# Altium PCB go_sign.PcbDoc (part 1 of 3)
Units mm, origin at the board's own origin, x right, y up, seen from the top; angles counter-clockwise.
Board outline 188.34 x 188.34 mm, 2 copper layers (Top Layer, Bottom Layer); 124 components, 124 nets, 557 pads, 137 vias.
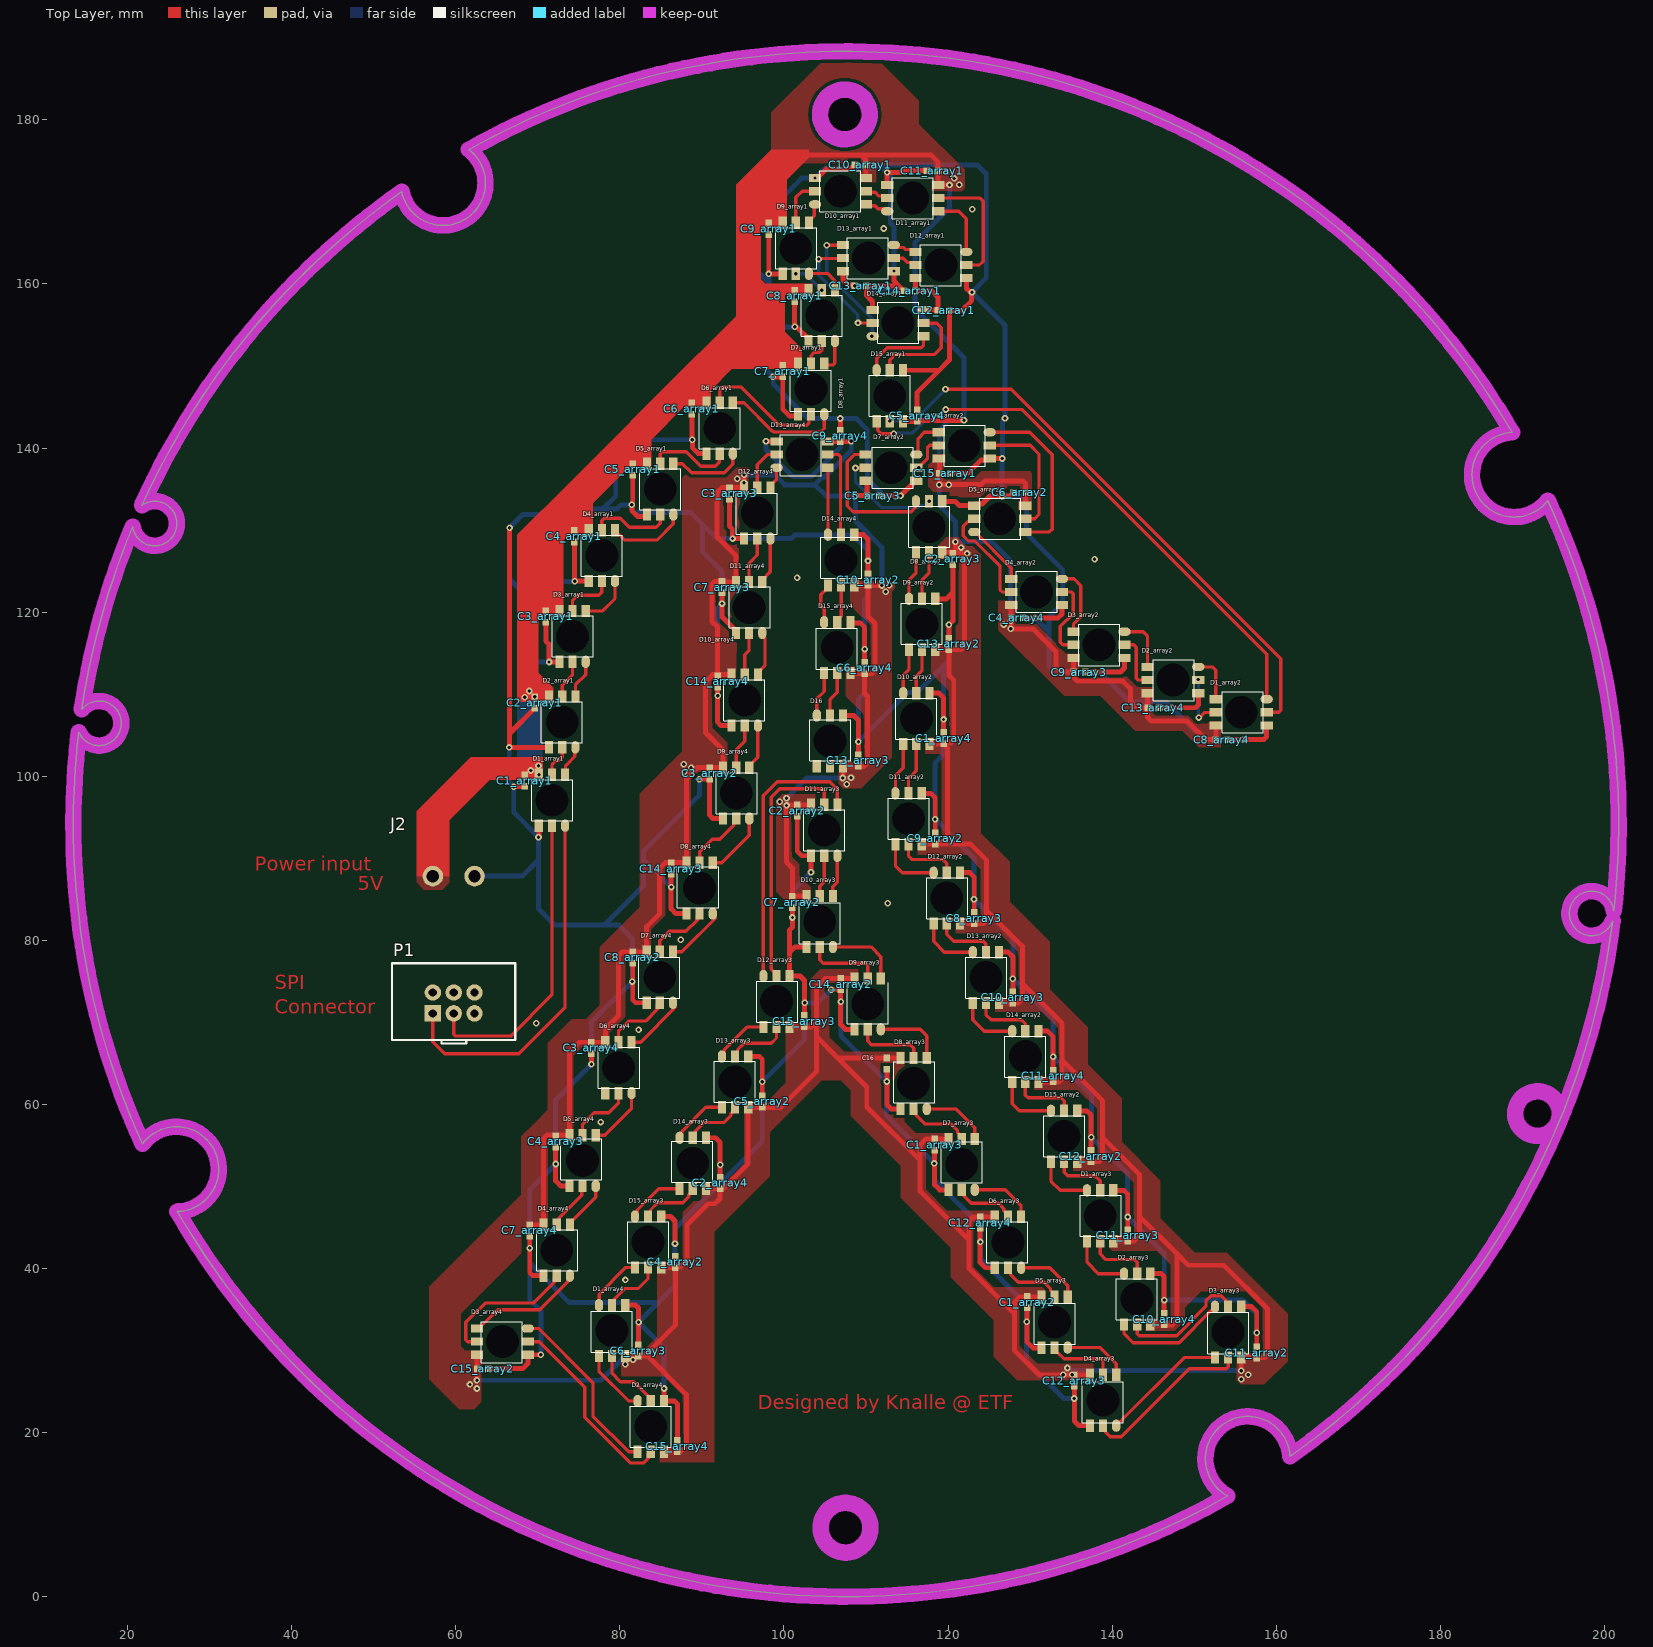
[diagram p0: Top Layer view]
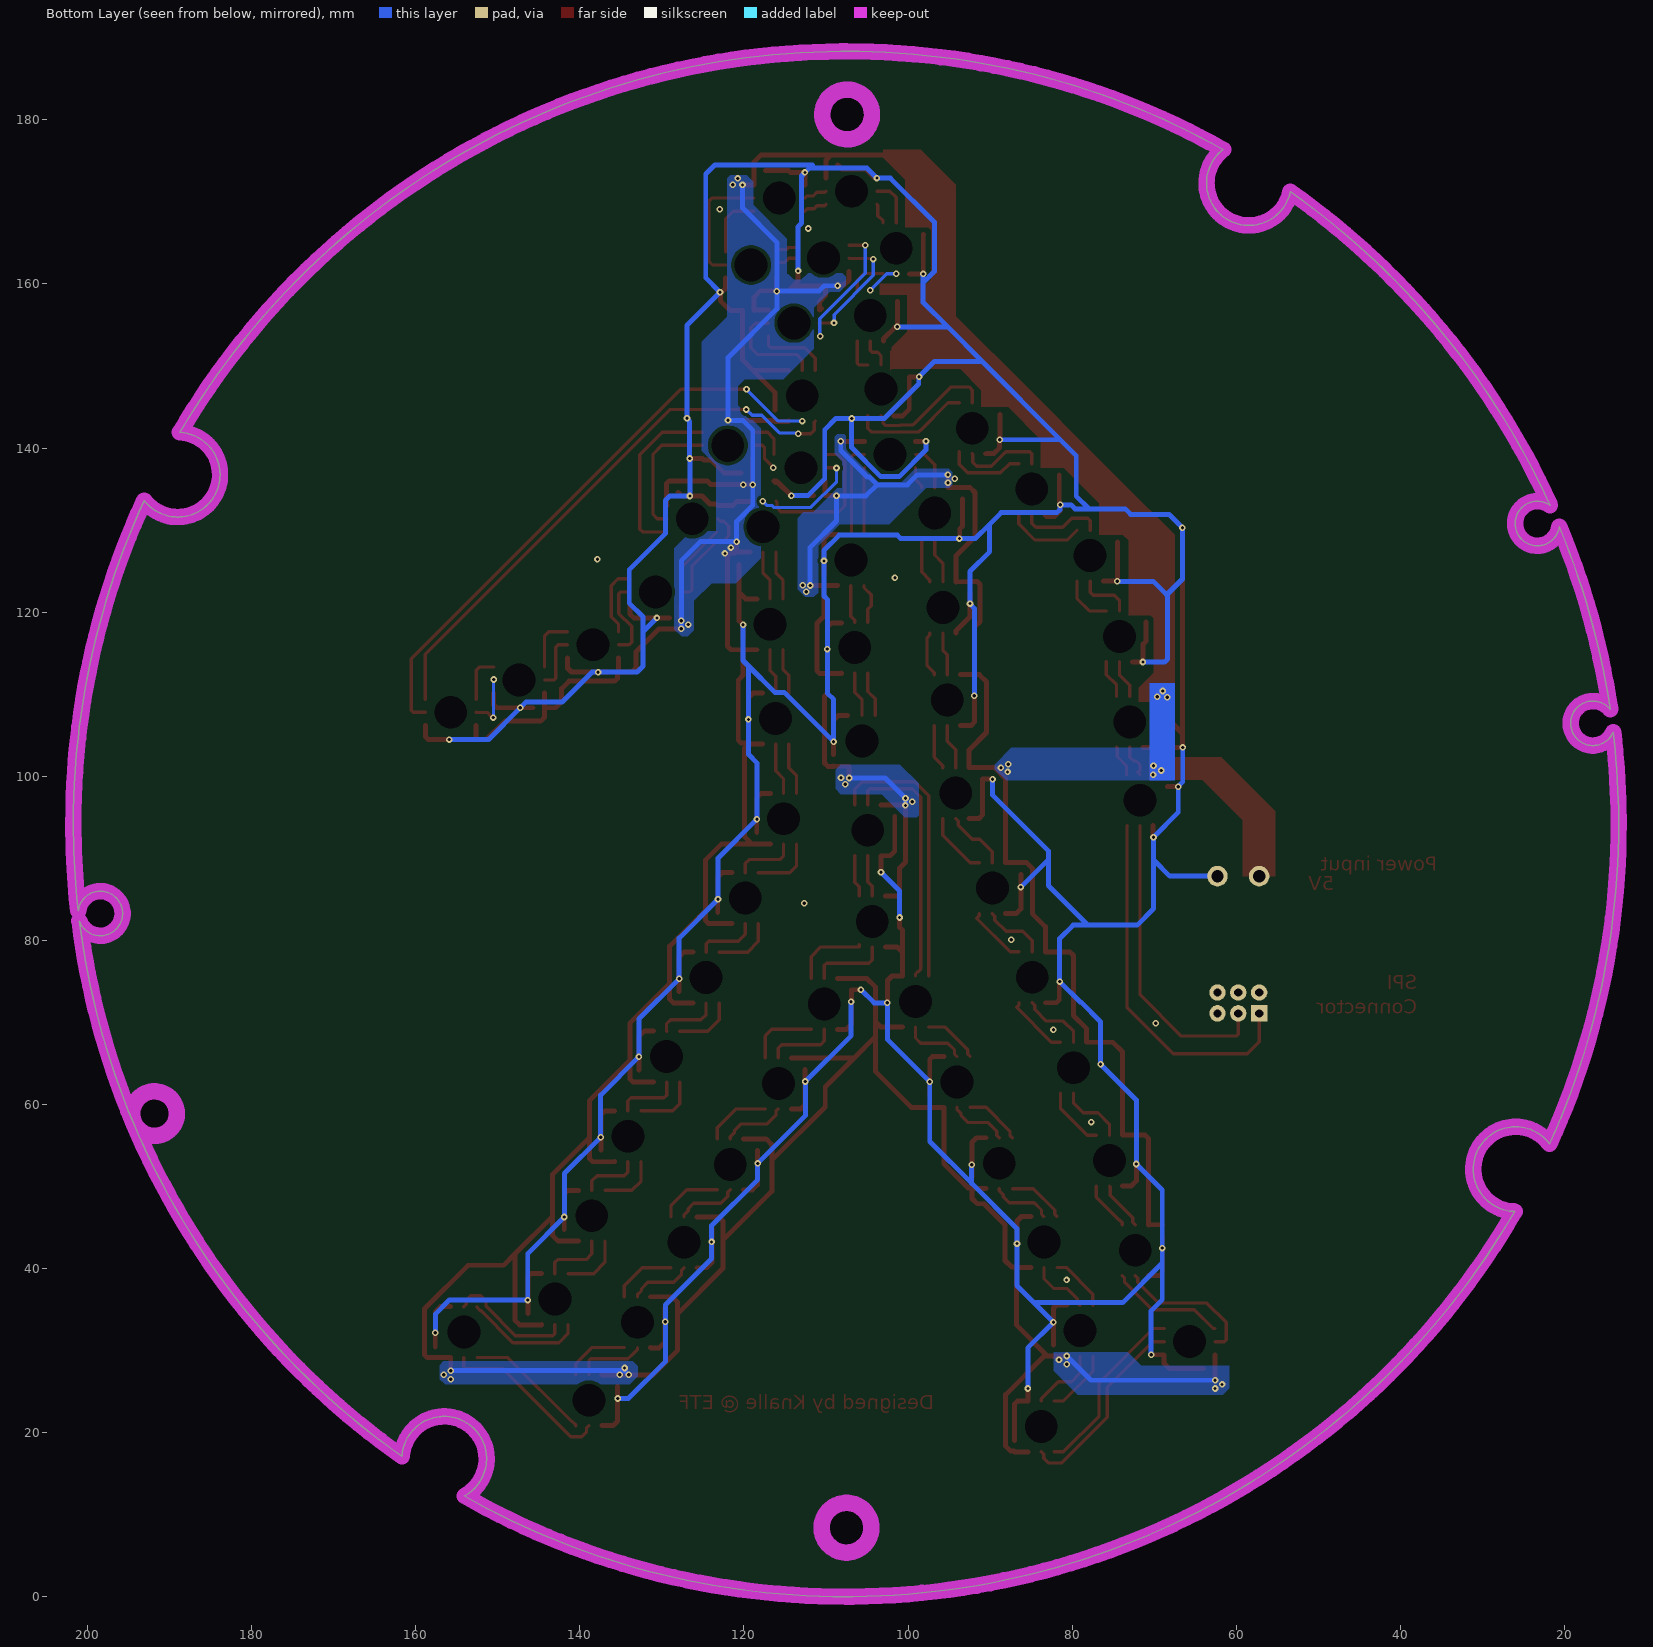
[diagram p1: Bottom Layer view, seen from below]
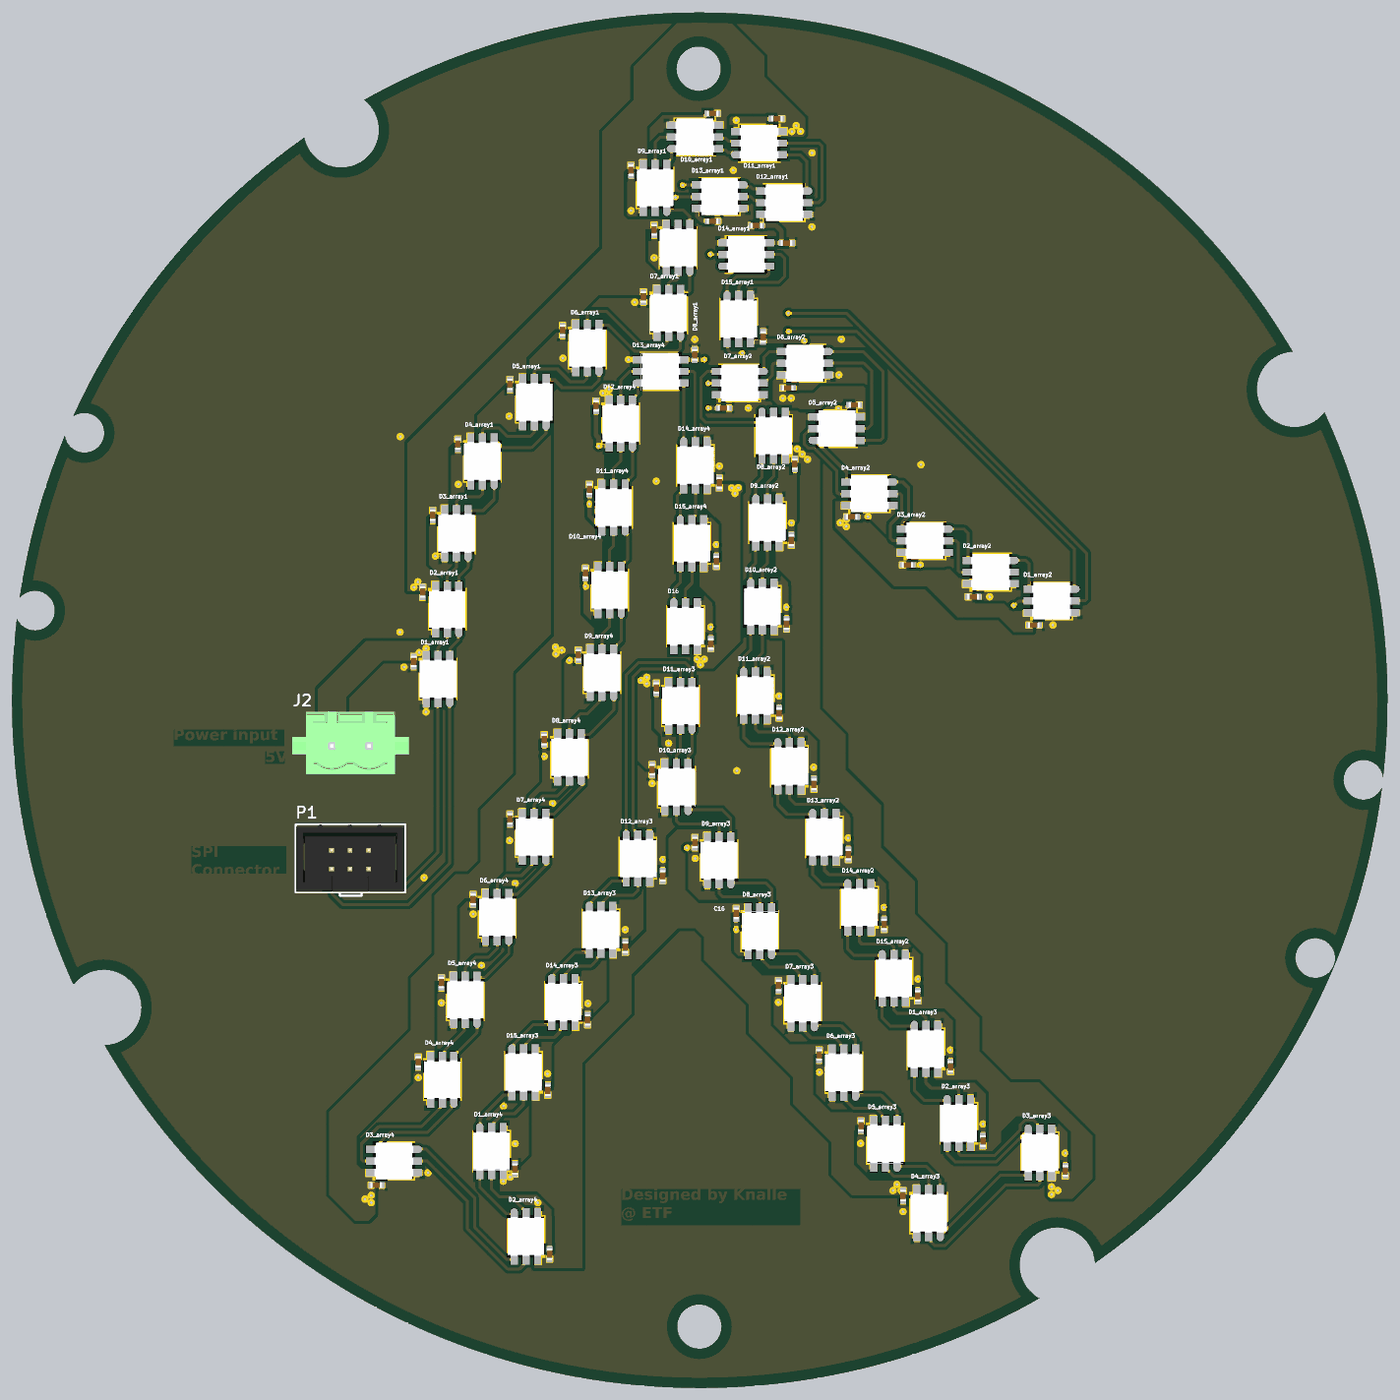
[diagram p3: 3D render of the assembled board from above, using the file's embedded part models]

## Layer stack, top to bottom
Top Solder: solder mask 0.0102, Solder Resist, Dk 3.5
Top Layer: signal copper 0.0356
Dielectric 1: dielectric 0.32, FR-4, Dk 4.8
Bottom Layer: signal copper 0.0356
Bottom Solder: solder mask 0.0102, Solder Resist, Dk 3.5

## Board outline
13.398,94.176 13.4,94.844 cw(c107.431,94.169) 13.486,98.236 cw(c108.373,94.129) 13.641,100.929 cw(c109.341,94.06) 13.836,103.248 cw(c110.279,93.97) 14.06,105.342 ccw(c16.538,106.451) 16.216,103.755 ccw(c16.534,106.46) 16.397,103.74 ccw(c16.535,106.49) 16.536,103.737 ccw(c16.536,106.495) 16.674,103.74 ccw(c16.535,106.451) 19.229,106.118 ccw(c16.523,106.448) 19.245,106.307 ccw(c16.496,106.45) 19.249,106.45 ccw(c16.495,106.45) 19.245,106.588 ccw(c16.535,106.45) 16.868,109.143 ccw(c16.537,106.437) 16.678,109.16 ccw(c16.536,106.41) 16.536,109.163 16.49,109.163 ccw(c16.535,106.421) 16.339,109.156 ccw(c16.53,106.469) 15.285,108.858 ccw(c16.546,106.44) 14.434,108.165 cw(c106.909,94.405) 20.624,130.405 ccw(c23.311,130.799) 21.771,128.563 ccw(c23.301,130.779) 22.634,128.17 ccw(c23.301,130.782) 22.991,128.104 ccw(c23.304,130.81) 23.168,128.089 ccw(c23.306,130.84) 23.306,128.086 ccw(c23.306,130.844) 23.444,128.089 ccw(c23.305,130.8) 25.999,130.467 ccw(c23.292,130.797) 26.016,130.656 ccw(c23.266,130.799) 26.019,130.799 ccw(c23.261,130.799) 26.016,130.938 ccw(c23.305,130.799) 23.638,133.492 ccw(c23.308,130.788) 23.449,133.509 ccw(c23.306,130.76) 23.306,133.512 ccw(c23.306,130.763) 23.244,133.512 ccw(c23.305,130.786) 23.08,133.503 ccw(c23.302,130.82) 22.506,133.392 ccw(c23.304,130.813) 22.07,133.214 ccw(c23.318,130.787) 21.764,133.03 cw(c107.829,93.914) 53.412,171.22 ccw(c58.467,172.294) 57.847,167.164 ccw(c58.46,172.319) 58.197,167.134 ccw(c58.463,172.373) 58.464,167.128 ccw(c58.464,172.377) 58.727,167.134 ccw(c58.463,172.293) 63.589,171.66 ccw(c58.433,172.289) 63.621,172.02 ccw(c58.385,172.291) 63.628,172.292 ccw(c58.406,172.292) 63.626,172.411 ccw(c58.428,172.293) 63.611,172.703 ccw(c58.516,172.302) 63.183,174.387 ccw(c58.483,172.287) 62.789,175.107 ccw(c58.427,172.249) 61.61,176.38 cw(c107.372,94.762) 96.031,187.644 cw(c107.512,93.722) 102.74,188.223 cw(c107.563,92.753) 107.567,188.345 108.189,188.343 cw(c107.575,92.784) 113.131,188.183 cw(c107.59,94.201) 188.756,141.902 ccw(c189.022,136.683) 188.633,141.894 ccw(c189.018,136.745) 184.783,139.699 ccw(c188.984,136.761) 184.021,138.047 ccw(c188.99,136.761) 183.892,137.355 ccw(c189.046,136.754) 183.864,137.015 ccw(c189.099,136.752) 183.857,136.751 ccw(c189.106,136.751) 183.864,136.488 ccw(c189.022,136.752) 188.389,131.625 ccw(c189.018,136.784) 188.749,131.594 ccw(c189.021,136.834) 189.021,131.587 ccw(c189.021,136.829) 189.141,131.589 ccw(c189.023,136.787) 189.432,131.603 ccw(c189.032,136.699) 191.109,132.029 ccw(c189.017,136.732) 191.833,132.423 ccw(c188.978,136.788) 193.105,133.599 cw(c108.158,94.371) 200.997,106.02 cw(c107.157,94.232) 201.61,99.086 cw(c106.186,94.18) 201.736,94.176 201.731,93.211 cw(c108.008,94.184) 201.676,90.809 cw(c107.085,94.216) 201.578,88.74 cw(c106.161,94.269) 201.453,86.883 cw(c105.177,94.345) 201.306,85.182 201.141,83.594 ccw(c198.446,83.272) 199.957,85.527 ccw(c198.453,83.287) 199.254,85.863 ccw(c198.455,83.29) 198.773,85.966 ccw(c198.45,83.259) 198.59,85.981 ccw(c198.449,83.232) 198.449,85.985 ccw(c198.448,83.231) 198.31,85.982 ccw(c198.449,83.271) 195.755,83.604 ccw(c198.465,83.273) 195.739,83.415 ccw(c198.492,83.272) 195.735,83.272 ccw(c198.493,83.272) 195.739,83.133 ccw(c198.449,83.272) 198.117,80.578 ccw(c198.447,83.287) 198.306,80.562 ccw(c198.449,83.315) 198.449,80.558 198.477,80.558 ccw(c198.449,83.306) 198.617,80.563 ccw(c198.446,83.271) 200.999,82.353 cw(c108.192,93.955) 195.022,59.193 cw(c107.343,94.396) 161.685,17.106 ccw(c156.483,16.811) 161.678,17.203 ccw(c156.53,16.814) 159.48,21.051 ccw(c156.545,16.848) 157.827,21.812 ccw(c156.546,16.842) 157.138,21.94 ccw(c156.539,16.789) 156.798,21.968 ccw(c156.536,16.734) 156.536,21.975 ccw(c156.535,16.73) 156.272,21.968 ccw(c156.536,16.809) 151.41,17.442 ccw(c156.566,16.814) 151.379,17.083 ccw(c156.618,16.811) 151.372,16.811 ccw(c156.64,16.81) 151.372,16.746 ccw(c156.604,16.81) 151.383,16.461 ccw(c156.536,16.81) 154.067,12.274 cw(c107.771,93.583) 119.009,0.695 cw(c107.623,94.677) 112.408,0.129 cw(c107.572,95.649) 107.567,0.006 106.733,0.01 cw(c107.557,95.524) 101.662,0.189 cw(c107.546,94.158) 26.083,46.95 ccw(c25.955,52.184) 26.308,46.96 ccw(c25.959,52.11) 30.218,49.194 ccw(c25.988,52.098) 30.929,50.713 ccw(c25.987,52.097) 31.083,51.493 ccw(c25.931,52.104) 31.113,51.839 ccw(c25.879,52.107) 31.12,52.107 ccw(c25.874,52.107) 31.113,52.371 ccw(c25.954,52.106) 26.587,57.233 ccw(c25.959,52.076) 26.228,57.264 ccw(c25.956,52.028) 25.955,57.271 ccw(c25.955,52.03) 25.849,57.27 ccw(c25.954,52.073) 25.563,57.256 ccw(c25.945,52.161) 23.826,56.81 ccw(c25.962,52.126) 23.125,56.423 ccw(c26.001,52.069) 21.823,55.194 cw(c106.958,93.966) 14.094,82.676 cw(c108.07,94.12) 13.521,89.325 cw(c109.045,94.171)
cut-out: 104.482,8.253 cw(c107.557,8.408) 104.479,8.408 cw(c107.557,8.408) 104.483,8.567 cw(c107.525,8.41) 104.501,8.778 cw(c107.508,8.407) 107.353,11.432 cw(c107.507,8.361) 107.507,11.436 cw(c107.507,8.358) 107.667,11.432 cw(c107.509,8.392) 107.878,11.414 cw(c107.506,8.407) 110.532,8.562 cw(c107.461,8.408) 110.536,8.408 cw(c107.462,8.407) 110.532,8.248 cw(c107.492,8.406) 110.513,8.037 cw(c107.507,8.408) 107.662,5.383 cw(c107.507,8.458) 107.507,5.379 cw(c107.507,8.457) 107.348,5.383 cw(c107.505,8.425) 107.137,5.402 cw(c107.508,8.408)
cut-out: 189.13,58.739 ccw(c191.84,58.878) 191.508,56.184 ccw(c191.838,58.893) 191.697,56.168 ccw(c191.84,58.921) 191.84,56.164 ccw(c191.84,58.922) 191.978,56.168 ccw(c191.839,58.878) 194.533,58.545 ccw(c191.827,58.876) 194.549,58.734 ccw(c191.8,58.877) 194.553,58.877 ccw(c191.795,58.878) 194.55,59.016 ccw(c191.839,58.877) 192.172,61.571 ccw(c191.842,58.865) 191.983,61.587 ccw(c191.84,58.838) 191.84,61.591 ccw(c191.84,58.833) 191.701,61.587 ccw(c191.84,58.877) 189.147,59.209 ccw(c191.855,58.879) 189.13,59.02 ccw(c191.883,58.878) 189.126,58.877 ccw(c191.884,58.877)
cut-out: 191.979,56.161 cw(c191.978,56.168) 191.978,56.174 ccw(c191.839,58.878) 194.526,58.546 cw(c194.533,58.545) 194.54,58.545 cw(c194.533,58.545) 194.54,58.545 cw(c191.839,58.878)
cut-out: 107.054,177.647 cw(c107.425,180.654) 104.4,180.499 cw(c107.475,180.653) 104.396,180.653 cw(c107.474,180.653) 104.4,180.813 cw(c107.443,180.655) 104.418,181.024 cw(c107.425,180.653) 107.27,183.678 cw(c107.424,180.607) 107.425,183.682 cw(c107.425,180.604) 107.584,183.678 cw(c107.427,180.638) 107.795,183.66 cw(c107.424,180.653) 110.449,180.808 cw(c107.379,180.654) 110.453,180.653 cw(c107.379,180.653) 110.449,180.494 cw(c107.409,180.651) 110.431,180.283 cw(c107.424,180.654) 107.579,177.629 cw(c107.425,180.703) 107.425,177.625 cw(c107.424,180.703) 107.265,177.629 cw(c107.423,180.672)

## Design rules (kind name [scope] priority, off if disabled: settings)
Clearance [All] p1: gap=0.4 ignorepadtopadclearanceinfootprint=FALSE except(0: Fill-Text Poly-Text Region-Text; 0.3: SMDPad-THPad SMDPad-Hole)
HoleSize [All] p1: absolutevalues=TRUE maxlimit=5 minlimit=0.025 maxpercent=80.000 minpercent=20.000
MinimumSolderMaskSliver [All] p1 off: minsoldermaskwidth=0.254
PlaneConnect PlaneConnect_1 [IsVia] p1: planeconnectstyle=Direct reliefexpansion=0.508 reliefentries=4 reliefconductorwidth=0.254 reliefairgap=0.254
PlaneConnect [All] p2: planeconnectstyle=Relief reliefexpansion=0.508 reliefentries=4 reliefconductorwidth=0.8 reliefairgap=0.4
PolygonConnect PolygonConnect_2 [InNet('5V')] p1: connectstyle=Direct reliefconductorwidth=0.254 reliefentries=4 polygonreliefangle="90 Angle" airgapwidth=0.254
PolygonConnect PolygonConnect_1 [IsVia] p2: connectstyle=Direct reliefconductorwidth=0.254 reliefentries=4 polygonreliefangle="90 Angle" airgapwidth=0.254
PolygonConnect [All] p3: connectstyle=Relief reliefconductorwidth=0.8 reliefentries=4 polygonreliefangle="90 Angle" airgapwidth=0.4
RoutingVias [All] p1: holewidth=0.4 width=0.8 viastyle="Through Hole" minholewidth=0.4 minwidth=0.8 maxholewidth=0.4 maxwidth=0.8
SilkToSilkClearance [All] p1 off: silktosilkclearance=0.254
SilkToSolderMaskClearance [IsPad] p1 off: minsilkscreentomaskgap=0.254 clearancetoexposedcopper=TRUE
SolderMaskExpansion [All] p1: expansion=0.102 istentingtop=FALSE
Width [All] p1: maxlimit=1.2 minlimit=0.3 preferedwidth=0.4
25 further rules are at their usual default settings.

## Classes and differential pairs
channel class sk9822_array: array1 array2 array3 array4
component class go_sign: C16 D16 J2 P1
component class array4: C1_array4 C2_array4 C3_array4 C4_array4 C5_array4 C6_array4 C7_array4 C8_array4 C9_array4 C10_array4 C11_array4 C12_array4 C13_array4 C14_array4 C15_array4 D1_array4 D2_array4 D3_array4 D4_array4 D5_array4 D6_array4 D7_array4 D8_array4 D9_array4 D10_array4 D11_array4 D12_array4 D13_array4 D14_array4 D15_array4
component class array3: C1_array3 C2_array3 C3_array3 C4_array3 C5_array3 C6_array3 C7_array3 C8_array3 C9_array3 C10_array3 C11_array3 C12_array3 C13_array3 C14_array3 C15_array3 D1_array3 D2_array3 D3_array3 D4_array3 D5_array3 D6_array3 D7_array3 D8_array3 D9_array3 D10_array3 D11_array3 D12_array3 D13_array3 D14_array3 D15_array3
component class array2: C1_array2 C2_array2 C3_array2 C4_array2 C5_array2 C6_array2 C7_array2 C8_array2 C9_array2 C10_array2 C11_array2 C12_array2 C13_array2 C14_array2 C15_array2 D1_array2 D2_array2 D3_array2 D4_array2 D5_array2 D6_array2 D7_array2 D8_array2 D9_array2 D10_array2 D11_array2 D12_array2 D13_array2 D14_array2 D15_array2
component class array1: C1_array1 C2_array1 C3_array1 C4_array1 C5_array1 C6_array1 C7_array1 C8_array1 C9_array1 C10_array1 C11_array1 C12_array1 C13_array1 C14_array1 C15_array1 D1_array1 D2_array1 D3_array1 D4_array1 D5_array1 D6_array1 D7_array1 D8_array1 D9_array1 D10_array1 D11_array1 D12_array1 D13_array1 D14_array1 D15_array1

## Components (designator, comment, footprint, x,y, rotation, side; value= is the part's Value field where it differs from the comment)
C1_array1 "0603, capacitor" "0603 cap" 68.4,99.465 r270 top value=100n (schematic designator C1)
C1_array2 "0603, capacitor" "0603 cap" 129.639,35.901 r270 top value=100n (schematic designator C1)
C1_array3 "0603, capacitor" "0603 cap" 118.362,55.104 r270 top value=100n (schematic designator C1)
C1_array4 "0603, capacitor" "0603 cap" 119.459,104.637 r90 top value=100n (schematic designator C1)
C2_array1 "0603, capacitor" "0603 cap" 69.632,108.977 r270 top value=100n (schematic designator C2)
C2_array2 "0603, capacitor" "0603 cap" 101.623,95.82 r270 top value=100n (schematic designator C2)
C2_array3 "0603, capacitor" "0603 cap" 120.574,126.492 r270 top value=100n (schematic designator C2)
C2_array4 "0603, capacitor" "0603 cap" 92.217,50.433 r90 top value=100n (schematic designator C2)
C3_array1 "0603, capacitor" "0603 cap" 70.991,119.48 r270 top value=100n (schematic designator C3)
C3_array2 "0603, capacitor" "0603 cap" 90.942,100.341 r270 top value=100n (schematic designator C3)
C3_array3 "0603, capacitor" "0603 cap" 93.368,134.466 r270 top value=100n (schematic designator C3)
C3_array4 "0603, capacitor" "0603 cap" 76.54,66.889 r270 top value=100n (schematic designator C3)
C4_array1 "0603, capacitor" "0603 cap" 74.445,129.246 r270 top value=100n (schematic designator C4)
C4_array2 "0603, capacitor" "0603 cap" 86.769,40.794 r90 top value=100n (schematic designator C4)
C4_array3 "0603, capacitor" "0603 cap" 72.184,55.498 r270 top value=100n (schematic designator C4)
C4_array4 "0603, capacitor" "0603 cap" 128.386,119.289 r0 top value=100n (schematic designator C4)
C5_array1 "0603, capacitor" "0603 cap" 81.572,137.401 r270 top value=100n (schematic designator C5)
C5_array2 "0603, capacitor" "0603 cap" 97.371,60.376 r90 top value=100n (schematic designator C5)
C5_array3 "0603, capacitor" "0603 cap" 110.847,134.186 r0 top value=100n (schematic designator C5)
C5_array4 "0603, capacitor" "0603 cap" 116.246,143.943 r90 top value=100n (schematic designator C5)
C6_array1 "0603, capacitor" "0603 cap" 88.773,144.793 r270 top value=100n (schematic designator C6)
C6_array2 "0603, capacitor" "0603 cap" 128.726,134.61 r180 top value=100n (schematic designator C6)
C6_array3 "0603, capacitor" "0603 cap" 82.273,29.999 r90 top value=100n (schematic designator C6)
C6_array4 "0603, capacitor" "0603 cap" 109.845,113.209 r90 top value=100n (schematic designator C6)
C7_array1 "0603, capacitor" "0603 cap" 99.858,149.376 r270 top value=100n (schematic designator C7)
C7_array2 "0603, capacitor" "0603 cap" 101.039,84.657 r270 top value=100n (schematic designator C7)
C7_array3 "0603, capacitor" "0603 cap" 92.454,123.036 r270 top value=100n (schematic designator C7)
C7_array4 "0603, capacitor" "0603 cap" 69.022,44.639 r270 top value=100n (schematic designator C7)
C8_array1 "0603, capacitor" "0603 cap" 101.305,158.545 r270 top value=100n (schematic designator C8)
C8_array2 "0603, capacitor" "0603 cap" 81.57,77.913 r270 top value=100n (schematic designator C8)
C8_array3 "0603, capacitor" "0603 cap" 123.205,82.704 r90 top value=100n (schematic designator C8)
C8_array4 "0603, capacitor" "0603 cap" 153.341,104.468 r0 top value=100n (schematic designator C8)
C9_array1 "0603, capacitor" "0603 cap" 98.143,166.724 r270 top value=100n (schematic designator C9)
C9_array2 "0603, capacitor" "0603 cap" 118.443,92.419 r90 top value=100n (schematic designator C9)
C9_array3 "0603, capacitor" "0603 cap" 136.019,112.697 r0 top value=100n (schematic designator C9)
C9_array4 "0603, capacitor" "0603 cap" 106.886,141.479 r90 top value=100n (schematic designator C9)
C10_array1 "0603, capacitor" "0603 cap" 109.309,174.523 r180 top value=100n (schematic designator C10)
C10_array2 "0603, capacitor" "0603 cap" 110.251,123.954 r90 top value=100n (schematic designator C10)
C10_array3 "0603, capacitor" "0603 cap" 127.917,73.052 r90 top value=100n (schematic designator C10)
C10_array4 "0603, capacitor" "0603 cap" 146.345,33.834 r90 top value=100n (schematic designator C10)
C11_array1 "0603, capacitor" "0603 cap" 118.096,173.815 r180 top value=100n (schematic designator C11)
C11_array2 "0603, capacitor" "0603 cap" 157.635,29.758 r90 top value=100n (schematic designator C11)
C11_array3 "0603, capacitor" "0603 cap" 141.912,44.032 r90 top value=100n (schematic designator C11)
C11_array4 "0603, capacitor" "0603 cap" 132.806,63.489 r90 top value=100n (schematic designator C11)
C12_array1 "0603, capacitor" "0603 cap" 119.47,156.779 r0 top value=100n (schematic designator C12)
C12_array2 "0603, capacitor" "0603 cap" 137.429,53.71 r90 top value=100n (schematic designator C12)
C12_array3 "0603, capacitor" "0603 cap" 135.405,26.326 r270 top value=100n (schematic designator C12)
C12_array4 "0603, capacitor" "0603 cap" 123.911,45.591 r270 top value=100n (schematic designator C12)
C13_array1 "0603, capacitor" "0603 cap" 109.349,159.776 r0 top value=100n (schematic designator C13)
C13_array2 "0603, capacitor" "0603 cap" 120.119,116.118 r90 top value=100n (schematic designator C13)
C13_array3 "0603, capacitor" "0603 cap" 109.083,101.919 r90 top value=100n (schematic designator C13)
C13_array4 "0603, capacitor" "0603 cap" 145.023,108.341 r0 top value=100n (schematic designator C13)
C14_array1 "0603, capacitor" "0603 cap" 115.314,159.172 r180 top value=100n (schematic designator C14)
C14_array2 "0603, capacitor" "0603 cap" 106.906,74.674 r270 top value=100n (schematic designator C14)
C14_array3 "0603, capacitor" "0603 cap" 86.256,88.746 r270 top value=100n (schematic designator C14)
C14_array4 "0603, capacitor" "0603 cap" 91.92,111.568 r270 top value=100n (schematic designator C14)
C15_array1 "0603, capacitor" "0603 cap" 119.648,136.942 r0 top value=100n (schematic designator C15)
C15_array2 "0603, capacitor" "0603 cap" 63.298,27.785 r0 top value=100n (schematic designator C15)
C15_array3 "0603, capacitor" "0603 cap" 102.504,70.144 r90 top value=100n (schematic designator C15)
C15_array4 "0603, capacitor" "0603 cap" 87.01,18.34 r90 top value=100n (schematic designator C15)
C16 "0603, capacitor" "0603 cap" 112.558,64.959 r270 top value=100n
D1_array1 "Neo - SK9822" SK9822_FLIPPED 71.73,97.079 r270 top value=WS2812 (schematic designator D1)
D1_array2 "Neo - SK9822" SK9822_FLIPPED 155.74,107.785 r0 top value=WS2812 (schematic designator D1)
D1_array3 "Neo - SK9822" SK9822_FLIPPED 138.544,46.431 r90 top value=WS2812 (schematic designator D1)
D1_array4 "Neo - SK9822" SK9822_FLIPPED 79.057,32.436 r90 top value=WS2812 (schematic designator D1)
D2_array1 "Neo - SK9822" SK9822_FLIPPED 72.987,106.617 r270 top value=WS2812 (schematic designator D2)
D2_array2 "Neo - SK9822" SK9822_FLIPPED 147.409,111.722 r0 top value=WS2812 (schematic designator D2)
D2_array3 "Neo - SK9822" SK9822_FLIPPED 143.053,36.271 r90 top value=WS2812 (schematic designator D2)
D2_array4 "Neo - SK9822" SK9822_FLIPPED 83.769,20.752 r90 top value=WS2812 (schematic designator D2)
D3_array1 "Neo - SK9822" SK9822_FLIPPED 74.244,117.043 r270 top value=WS2812 (schematic designator D3)
D3_array2 "Neo - SK9822" SK9822_FLIPPED 138.405,116.014 r0 top value=WS2812 (schematic designator D3)
D3_array3 "Neo - SK9822" SK9822_FLIPPED 154.14,32.245 r90 top value=WS2812 (schematic designator D3)
D3_array4 "Neo - SK9822" SK9822_FLIPPED 65.684,31.09 r0 top value=WS2812 (schematic designator D3)
D4_array1 "Neo - SK9822" SK9822_FLIPPED 77.813,126.886 r270 top value=WS2812 (schematic designator D4)
D4_array2 "Neo - SK9822" SK9822_FLIPPED 130.797,122.453 r0 top value=WS2812 (schematic designator D4)
D4_array3 "Neo - SK9822" SK9822_FLIPPED 138.9,23.952 r270 top value=WS2812 (schematic designator D4)
D4_array4 "Neo - SK9822" SK9822_FLIPPED 72.314,42.227 r270 top value=WS2812 (schematic designator D4)
D5_array1 "Neo - SK9822" SK9822_FLIPPED 84.925,134.988 r270 top value=WS2812 (schematic designator D5)
D5_array2 "Neo - SK9822" SK9822_FLIPPED 126.301,131.369 r180 top value=WS2812 (schematic designator D5)
D5_array3 "Neo - SK9822" SK9822_FLIPPED 132.99,33.46 r270 top value=WS2812 (schematic designator D5)
D5_array4 "Neo - SK9822" SK9822_FLIPPED 75.463,53.149 r270 top value=WS2812 (schematic designator D5)
D6_array1 "Neo - SK9822" SK9822_FLIPPED 92.177,142.405 r270 top value=WS2812 (schematic designator D6)
D6_array2 "Neo - SK9822" SK9822_FLIPPED 121.971,140.322 r0 top value=WS2812 (schematic designator D6)
D6_array3 "Neo - SK9822" SK9822_FLIPPED 127.305,43.193 r270 top value=WS2812 (schematic designator D6)
D6_array4 "Neo - SK9822" SK9822_FLIPPED 79.832,64.478 r270 top value=WS2812 (schematic designator D6)
D7_array1 "Neo - SK9822" SK9822_FLIPPED 103.314,147.206 r270 top value=WS2812 (schematic designator D7)
D7_array2 "Neo - SK9822" SK9822_FLIPPED 113.043,137.605 r0 top value=WS2812 (schematic designator D7)
D7_array3 "Neo - SK9822" SK9822_FLIPPED 121.666,52.692 r270 top value=WS2812 (schematic designator D7)
D7_array4 "Neo - SK9822" SK9822_FLIPPED 84.874,75.489 r270 top value=WS2812 (schematic designator D7)
D8_array1 "Neo - SK9822" SK9822_FLIPPED 104.61,156.134 r270 top value=WS2812 (schematic designator D8)
D8_array2 "Neo - SK9822" SK9822_FLIPPED 117.691,130.404 r90 top value=WS2812 (schematic designator D8)
D8_array3 "Neo - SK9822" SK9822_FLIPPED 115.807,62.551 r270 top value=WS2812 (schematic designator D8)
D8_array4 "Neo - SK9822" SK9822_FLIPPED 89.725,86.36 r270 top value=WS2812 (schematic designator D8)
D9_array1 "Neo - SK9822" SK9822_FLIPPED 101.448,164.338 r270 top value=WS2812 (schematic designator D9)
D9_array2 "Neo - SK9822" SK9822_FLIPPED 116.84,118.516 r90 top value=WS2812 (schematic designator D9)
D9_array3 "Neo - SK9822" SK9822_FLIPPED 110.211,72.25 r270 top value=WS2812 (schematic designator D9)
D9_array4 "Neo - SK9822" SK9822_FLIPPED 94.183,97.942 r270 top value=WS2812 (schematic designator D9)
D10_array1 "Neo - SK9822" SK9822_FLIPPED 106.896,171.298 r180 top value=WS2812 (schematic designator D10)
D10_array2 "Neo - SK9822" SK9822_FLIPPED 116.141,107.023 r90 top value=WS2812 (schematic designator D10)
D10_array3 "Neo - SK9822" SK9822_FLIPPED 104.369,82.296 r270 top value=WS2812 (schematic designator D10)
D10_array4 "Neo - SK9822" SK9822_FLIPPED 95.225,109.271 r270 top value=WS2812 (schematic designator D10)
D11_array1 "Neo - SK9822" SK9822_FLIPPED 115.697,170.459 r180 top value=WS2812 (schematic designator D11)
D11_array2 "Neo - SK9822" SK9822_FLIPPED 115.189,94.818 r90 top value=WS2812 (schematic designator D11)
D11_array3 "Neo - SK9822" SK9822_FLIPPED 104.915,93.408 r270 top value=WS2812 (schematic designator D11)
D11_array4 "Neo - SK9822" SK9822_FLIPPED 95.758,120.561 r270 top value=WS2812 (schematic designator D11)
D12_array1 "Neo - SK9822" SK9822_FLIPPED 119.138,162.306 r0 top value=WS2812 (schematic designator D12)
D12_array2 "Neo - SK9822" SK9822_FLIPPED 119.85,85.141 r90 top value=WS2812 (schematic designator D12)
D12_array3 "Neo - SK9822" SK9822_FLIPPED 99.098,72.542 r90 top value=WS2812 (schematic designator D12)
D12_array4 "Neo - SK9822" SK9822_FLIPPED 96.749,132.067 r270 top value=WS2812 (schematic designator D12)
D13_array1 "Neo - SK9822" SK9822_FLIPPED 110.299,163.144 r0 top value=WS2812 (schematic designator D13)
D13_array2 "Neo - SK9822" SK9822_FLIPPED 124.625,75.451 r90 top value=WS2812 (schematic designator D13)
D13_array3 "Neo - SK9822" SK9822_FLIPPED 94.043,62.738 r90 top value=WS2812 (schematic designator D13)
D13_array4 "Neo - SK9822" SK9822_FLIPPED 102.21,139.205 r180 top value=WS2812 (schematic designator D13)
D14_array1 "Neo - SK9822" SK9822_FLIPPED 113.919,155.219 r180 top value=WS2812 (schematic designator D14)
D14_array2 "Neo - SK9822" SK9822_FLIPPED 129.426,65.824 r90 top value=WS2812 (schematic designator D14)
D14_array3 "Neo - SK9822" SK9822_FLIPPED 88.887,52.832 r90 top value=WS2812 (schematic designator D14)
D14_array4 "Neo - SK9822" SK9822_FLIPPED 106.972,126.34 r90 top value=WS2812 (schematic designator D14)
D15_array1 "Neo - SK9822" SK9822_FLIPPED 112.903,146.38 r90 top value=WS2812 (schematic designator D15)
D15_array2 "Neo - SK9822" SK9822_FLIPPED 134.15,56.121 r90 top value=WS2812 (schematic designator D15)
D15_array3 "Neo - SK9822" SK9822_FLIPPED 83.439,43.231 r90 top value=WS2812 (schematic designator D15)
D15_array4 "Neo - SK9822" SK9822_FLIPPED 106.502,115.672 r90 top value=WS2812 (schematic designator D15)
D16 "Neo - SK9822" SK9822_FLIPPED 105.613,104.305 r90 top value=WS2812
J2 "2 Pole MSTBA Connector" 2POLE_MSTBA 57.213,87.82 r0 top
P1 "2x3 Pin Header" "2X3 PH" 59.753,72.365 r0 top value="2x3 Pin Header, 2.54mm"

## Footprints (in the part's own frame and the unit in brackets; to place one, negate y for a bottom-side part, rotate by r counter-clockwise, add the part's x,y. Pads: shape width x height; smd on the part's side, far side on the other; paste and mask are expansions set on the pad)
2POLE_MSTBA [mm]
  round 2.5 hole 1.5 mask+0: 1(0,0) 2(5.08,0)
  body extent -5.46,-3.77 10.52,4.83, height 12
"2X3 PH" [mm] "2x3 Pin Header, 2.54 pitch"
  rect 2x2 hole 1: 1(-2.54,-1.27)
  round 2 hole 1: 2(0,-1.27) 3(2.54,-1.27) 4(2.54,1.27) 5(0,1.27) 6(-2.54,1.27)
  silkscreen extent -7.5,-4.94 7.5,4.84, body extent -7.48,-4.44 7.35,4.83, height 9.89
"0603 cap" [mm]
  rect 0.8x0.8 smd: 0(0.7,0.002) 1(-0.7,0.002)
  body extent -0.83,-0.4 0.77,0.4, height 0.6
SK9822_FLIPPED [mm]
  oval 1.5x1 smd: 1(3.1,1.6)
  rect 1.5x1 smd: 2(3.1,0) 3(3.1,-1.6) 4(-3.1,-1.6) 5(-3.1,0) 6(-3.1,1.6)
  round 1 hole 4: nc(0,0)
  body extent -2.7,-2.5 2.7,2.5, height 1.9

## Part data
P1: library part "2x3 Ribbon connector", "2x3 Ribbon connector"
D1_array1 D1_array2 D1_array3 D1_array4 D2_array1 D2_array2 D2_array3 D2_array4 D3_array1 D3_array2 D3_array3 D3_array4 D4_array1 D4_array2 D4_array3 D4_array4 D5_array1 D5_array2 D5_array3 D5_array4 D6_array1 D6_array2 D6_array3 D6_array4 D7_array1 D7_array2 D7_array3 D7_array4 D8_array1 D8_array2 D8_array3 D8_array4 D9_array1 D9_array2 D9_array3 D9_array4 D10_array1 D10_array2 D10_array3 D10_array4 D11_array1 D11_array2 D11_array3 D11_array4 D12_array1 D12_array2 D12_array3 D12_array4 D13_array1 D13_array2 D13_array3 D13_array4 D14_array1 D14_array2 D14_array3 D14_array4 D15_array1 D15_array2 D15_array3 D15_array4 D16: Digikey=1568-1800-ND

## Via types
v1: diameter 0.8, hole 0.4, Top Layer to Bottom Layer, 137 vias

## Nets (pads, with @x,y where several pads share a name; then routed paths per layer and width w, separated by ;. In a path a pad name is that pad's centre, name@x,y a point inside that pad or via, vN(x,y) a via of type N, cw(c..) or ccw(c..) an arc to the next point about the centre after c; other vN are vias at no path point)
5V: C1_array1.1 C1_array2.1 C1_array3.1 C1_array4.1 C2_array1.1 C2_array2.1 C2_array3.1 C2_array4.1 C3_array1.1 C3_array2.1 C3_array3.1 C3_array4.1 C4_array1.1 C4_array2.1 C4_array3.1 C4_array4.1 C5_array1.1 C5_array2.1 C5_array3.1 C5_array4.1 C6_array1.1 C6_array2.1 C6_array3.1 C6_array4.1 C7_array1.1 C7_array2.1 C7_array3.1 C7_array4.1 C8_array1.1 C8_array2.1 C8_array3.1 C8_array4.1 C9_array1.1 C9_array2.1 C9_array3.1 C9_array4.1 C10_array1.1 C10_array2.1 C10_array3.1 C10_array4.1 C11_array1.1 C11_array2.1 C11_array3.1 C11_array4.1 C12_array1.1 C12_array2.1 C12_array3.1 C12_array4.1 C13_array1.1 C13_array2.1 C13_array3.1 C13_array4.1 C14_array1.1 C14_array2.1 C14_array3.1 C14_array4.1 C15_array1.1 C15_array2.1 C15_array3.1 C15_array4.1 C16.1 D1_array1.4 D1_array2.4 D1_array3.4 D1_array4.4 D2_array1.4 D2_array2.4 D2_array3.4 D2_array4.4 D3_array1.4 D3_array2.4 D3_array3.4 D3_array4.4 D4_array1.4 D4_array2.4 D4_array3.4 D4_array4.4 D5_array1.4 D5_array2.4 D5_array3.4 D5_array4.4 D6_array1.4 D6_array2.4 D6_array3.4 D6_array4.4 D7_array1.4 D7_array2.4 D7_array3.4 D7_array4.4 D8_array1.4 D8_array2.4 D8_array3.4 D8_array4.4 D9_array1.4 D9_array2.4 D9_array3.4 D9_array4.4 D10_array1.4 D10_array2.4 D10_array3.4 D10_array4.4 D11_array1.4 D11_array2.4 D11_array3.4 D11_array4.4 D12_array1.4 D12_array2.4 D12_array3.4 D12_array4.4 D13_array1.4 D13_array2.4 D13_array3.4 D13_array4.4 D14_array1.4 D14_array2.4 D14_array3.4 D14_array4.4 D15_array1.4 D15_array2.4 D15_array3.4 D15_array4.4 D16.4 J2.1 | length 926
  Top Layer w0.6: J2.1@57.213,87.82 57.213,94.412 62.967,100.165 C1_array1.1@68.402,100.165 68.409,100.172 70.136,100.172 v1(70.143,100.179) ; v1@62.585,26.607 D3_array4.4@62.584,29.49 ; C7_array4.1@69.012,45.333 70.708,45.333 D4_array4.4@70.714,45.327 70.714,55.855 71.108,56.249 D5_array4.4@73.863,56.249 73.863,66.396 75.045,67.578 D6_array4.4@78.232,67.578 78.232,69.215 79.845,70.828 79.845,78.143 80.291,78.589 D7_array4.4@83.274,78.589 83.274,81.661 84.861,83.248 84.861,88.786 85.536,89.46 D8_array4.4@88.126,89.46 88.126,99.708 89.46,101.042 D9_array4.4@92.583,101.042 92.583,103.175 90.437,105.321 90.437,111.493 91.314,112.371 C14_array4.1@91.923,112.371 ; D2_array1.4@71.387,109.716 71.367,109.697 69.654,109.697 v1(69.634,109.677) 68.974,110.338 68.974,118.551 70.503,120.08 70.93,120.08 70.993,120.143 D3_array1.4@72.644,120.143 72.644,129.634 72.996,129.986 D4_array1.4@76.213,129.986 76.213,135.7 78.601,138.088 D5_array1.4@83.325,138.088 83.325,142.558 86.272,145.505 D6_array1.4@90.577,145.505 90.577,147.981 92.711,150.115 101.702,150.115 101.702,152.197 99.187,154.711 99.187,156.883 ; v1(80.657,29.336) C6_array3.1@82.271,29.336 ; C6_array3.1@82.271,29.299 C6_array3.1@82.271,29.336 ; D15_array3.4@85.039,40.131 85.057,40.112 86.748,40.112 C4_array2.1@86.766,40.094 ; D2_array4.4@85.369,17.652 C15_array4.1@87.008,17.652 ; C15_array4.1@87.008,17.64 C15_array4.1@87.008,17.652 ; D14_array3.4@90.487,49.732 C2_array4.1@92.215,49.733 ; C14_array4.1@91.923,112.268 C14_array4.1@91.923,112.371 ; D10_array4.4@93.625,112.371 C14_array4.1@91.923,112.371 ; v1(95.149,136.728) D12_array4.4@95.149,135.167 92.432,135.167 91.846,134.582 91.846,129.184 94.158,126.873 D11_array4.4@94.158,123.661 94.121,123.699 92.494,123.699 C7_array3.1@92.456,123.736 92.451,123.731 91.588,123.731 91.237,123.38 91.237,118.847 91.923,118.161 C14_array4.1@91.923,112.371 ; D12_array3.4@100.698,69.442 C15_array3.1@102.502,69.444 102.506,69.448 103.37,69.448 103.911,69.99 103.988,69.99 ; D10_array3.4@102.769,85.396 102.749,85.376 101.061,85.376 C7_array2.1@101.041,85.357 101.041,88.798 100.32,89.52 v1(100.32,96.442) 100.353,96.475 103.281,96.475 D11_array3.4@103.315,96.508 ; D8_array1.4@103.01,159.234 99.692,159.234 99.187,158.729 99.187,156.883 ; D13_array4.4@105.31,140.805 105.316,140.811 108.198,140.811 v1(108.204,140.818) ; v1(107.188,99.784) 107.201,99.797 107.201,101.193 107.22,101.212 109.073,101.212 C13_array3.1@109.08,101.219 109.106,101.194 109.77,101.194 110.18,101.604 110.18,109.746 109.842,110.084 C6_array4.1@109.842,112.509 ; D13_array1.4@107.2,161.544 107.2,160.484 107.805,159.879 108.548,159.879 108.598,159.829 v1(108.598,159.779) ; D15_array4.4@108.102,112.572 108.133,112.54 109.811,112.54 C6_array4.1@109.842,112.509 ; D14_array4.4@108.572,123.24 C10_array2.1@110.249,123.24 ; D9_array3.4@108.611,75.35 105.017,75.35 103.988,74.32 103.988,69.99 ; v1(108.721,134.188) C5_array3.1@110.147,134.188 D7_array2.4@110.147,136.004 ; D10_array1.4@109.996,172.898 110.002,172.904 110.002,174.514 C10_array1.1@110.009,174.521 109.996,174.534 109.996,175.081 109.347,175.73 ; C10_array2.1@110.249,123.253 C10_array2.1@110.249,123.24 ; v1(111.925,123.241) C10_array2.1@110.249,123.24 ; D8_array3.4@114.207,65.651 106.573,65.651 ; D15_array1.4@114.503,143.28 114.54,143.243 C5_array4.1@116.243,143.243 116.332,143.332 121.907,143.332 v1(121.945,143.37) ; v1(116.002,159.118) C14_array1.1@116.026,159.143 ; D12_array1.4@116.038,160.706 116.026,160.695 C14_array1.1@116.026,159.143 ; D11_array2.4@116.789,91.718 C9_array2.1@118.44,91.719 122.758,91.719 124.676,89.802 124.676,83.668 ; D14_array1.4@117.019,156.819 117.038,156.8 118.751,156.8 C12_array1.1@118.77,156.781 118.77,158.394 117.996,159.169 116.053,159.169 C14_array1.1@116.026,159.143 ; D10_array2.4@117.741,103.923 117.748,103.93 119.449,103.93 C1_array4.1@119.456,103.937 ; D9_array2.4@118.44,115.416 C13_array2.1@120.117,115.418 ; D6_array2.4@118.871,138.722 118.948,138.645 C15_array1.1@118.948,136.944 118.942,136.938 118.942,135.541 v1(118.935,135.534) 124.015,135.534 124.485,136.004 129.112,136.004 129.464,135.653 129.464,133.031 D5_array2.4@129.401,132.969 ; 119.105,91.819 119.926,92.641 119.926,103.467 C1_array4.1@119.456,103.937 ; D8_array2.4@119.291,127.304 C2_array3.1@120.903,127.304 ; D7_array3.4@120.066,55.792 117.286,55.792 116.599,55.105 116.599,53.188 ; v1(120.18,172.059) D11_array1.4@118.797,172.059 118.797,174.84 117.907,175.73 109.347,175.73 ; v1(120.904,128.588) C2_array3.1@120.904,127.305 ; D12_array2.4@121.45,82.041 124.319,82.041 124.676,82.398 124.676,83.668 ; D6_array3.4@125.705,46.293 C12_array4.1@123.914,46.291 123.903,46.281 123.052,46.281 122.58,45.809 122.58,43.421 ; D13_array2.4@126.225,72.351 128.574,72.351 129.057,72.834 129.057,74.739 ; D4_array2.4@127.697,120.853 127.692,120.848 127.692,119.297 C4_array4.1@127.686,119.291 127.66,119.266 127.66,117.983 v1(127.635,117.958) 130.353,117.958 133.172,115.138 133.172,113.195 133.667,112.7 C9_array3.1@135.319,112.7 ; D14_array2.4@131.026,62.724 133.514,62.724 133.904,63.114 133.904,65.392 ; D5_array3.4@131.39,36.56 128.75,36.56 128.092,35.903 128.092,34.493 ; v1(134.036,27.038) 131.089,27.038 128.092,30.035 128.092,34.493 ; v1@134.043,27.045 137.293,27.045 D4_array3.4@137.3,27.052 ; D3_array2.4@135.305,114.415 135.312,114.408 135.312,112.707 C9_array3.1@135.319,112.7 ; D15_array2.4@135.75,53.021 135.756,53.016 137.421,53.016 C12_array2.1@137.427,53.01 138.443,53.01 138.849,53.416 138.849,55.956 ; D1_array3.4@140.144,43.331 142.658,43.331 143.32,43.993 143.32,46.368 ; D2_array2.4@144.309,110.122 144.316,110.115 144.316,108.351 C13_array4.1@144.323,108.344 ; D2_array3.4@144.653,33.171 144.69,33.134 C10_array4.1@146.342,33.134 147.345,33.134 147.917,33.706 147.917,41.77 ; D1_array2.4@152.64,106.185 C8_array4.1@152.641,104.47 151.397,104.47 149.161,106.705 144.78,106.705 144.323,107.163 C13_array4.1@144.323,108.344 ; v1(155.74,27.546) D3_array3.4@155.74,29.145 158.602,29.145 158.953,29.497 158.953,35.065 153.619,40.399 149.288,40.399 147.917,41.77 ; C6_array3.1@82.271,29.336 83.019,29.336 ; 83.019,29.336 86.766,33.084 C4_array2.1@86.766,40.094 ; 83.019,29.336 83.408,29.336 88.108,24.636 88.108,18.35 87.498,17.74 87.096,17.74 C15_array4.1@87.008,17.652 ; C4_array2.1@86.766,40.094 86.866,40.194 87.4,40.194 88.189,40.983 88.189,45.326 90.754,47.892 91.567,47.892 92.215,48.539 C2_array4.1@92.215,49.733 ; C2_array4.1@92.215,49.733 92.315,49.833 92.705,49.833 95.643,52.772 D13_array3.4@95.643,59.638 99.592,59.638 103.988,64.033 103.988,68.237 ; 99.187,156.883 95.771,160.299 95.771,166.484 96.724,167.438 D9_array1.4@99.848,167.438 99.848,174.232 101.346,175.73 109.347,175.73 ; 103.988,68.237 106.573,65.651 ; 103.988,68.237 103.988,69.99 ; 106.573,65.651 110.096,62.128 110.096,59.69 116.599,53.188 ; C6_array4.1@109.842,112.509 110.748,112.509 111.1,112.861 111.1,118.643 110.249,119.494 C10_array2.1@110.249,123.24 ; 116.599,53.188 116.599,49.403 122.58,43.421 ; C1_array4.1@119.456,103.937 119.556,104.037 120.344,104.037 120.701,104.394 120.701,111.709 120.117,112.293 C13_array2.1@120.117,115.418 ; C13_array2.1@120.117,115.418 121.576,115.416 122.004,115.845 122.004,126.833 121.632,127.205 121.004,127.205 C2_array3.1@120.904,127.305 ; 122.58,43.421 122.58,40.005 128.092,34.493 ; 124.676,83.668 129.057,79.286 129.057,74.739 ; 129.057,74.739 133.904,69.893 133.904,65.392 ; 133.904,65.392 138.849,60.447 138.849,55.956 ; C9_array3.1@135.319,112.7 135.419,112.6 135.419,111.934 135.77,111.582 141.313,111.582 142.227,110.668 142.227,109.068 142.951,108.344 C13_array4.1@144.323,108.344 ; 138.849,55.956 143.32,51.486 143.32,46.368 ; 143.32,46.368 147.917,41.77
  Bottom Layer w0.6: v1(62.586,26.378) 77.7,26.378 v1(80.657,29.336) ; v1(68.974,110.388) 69.012,110.35 69.26,110.35 69.593,110.017 69.593,109.773 69.634,109.731 69.634,100.742 70.143,100.233 v1(70.143,100.179) ; v1(95.149,136.728) 98.861,136.728 100.084,135.505 103.742,135.505 ; v1(100.32,96.442) 100.32,97.322 102.781,99.784 v1(107.188,99.784) ; v1(108.204,140.818) 108.204,139.7 104.953,136.449 104.686,136.449 103.772,135.534 105.143,134.163 108.648,134.163 108.674,134.188 v1(108.721,134.188) 108.721,131.105 111.938,127.889 111.938,123.253 v1(111.925,123.241) ; v1(108.598,159.779) 110.211,159.779 110.871,159.118 v1@115.948,159.118 ; v1(120.18,172.059) 120.18,169.266 115.989,165.075 115.989,159.131 v1(116.002,159.118) 116.002,156.955 121.945,151.011 v1(121.945,143.37) 120.142,143.37 118.935,142.164 v1(118.935,135.534) 118.935,133.018 120.904,131.05 v1(120.904,128.588) 125.311,128.588 127.635,126.263 v1(127.635,117.958) ; v1(134.036,27.038) 134.544,27.546 v1(155.74,27.546)
  other v1: 62.586,25.375 61.735,25.87 155.727,26.505 156.604,27.051 135.141,27.064 134.556,27.877 80.658,28.321 81.61,28.892 99.504,96.901 100.317,97.32 107.658,99.035 108.179,99.797 87.871,100.52 69.139,100.698 88.684,101.028 70.091,101.27 87.808,101.46 68.415,109.639 126.797,118.478 127.635,118.961 112.395,122.492 112.84,123.279 122.326,127.152 121.59,127.864 120.091,135.534 95.136,135.763 94.297,136.246 121.361,172.072 120.777,172.86
CKI: D1_array1.2 P1.2 | length 37.3
  Top Layer w0.4: P1.2@59.753,71.095 59.753,68.56 59.988,68.326 66.7,68.326 71.73,73.355 D1_array1.2@71.73,93.979
GND: C1_array1.0 C1_array2.0 C1_array3.0 C1_array4.0 C2_array1.0 C2_array2.0 C2_array3.0 C2_array4.0 C3_array1.0 C3_array2.0 C3_array3.0 C3_array4.0 C4_array1.0 C4_array2.0 C4_array3.0 C4_array4.0 C5_array1.0 C5_array2.0 C5_array3.0 C5_array4.0 C6_array1.0 C6_array2.0 C6_array3.0 C6_array4.0 C7_array1.0 C7_array2.0 C7_array3.0 C7_array4.0 C8_array1.0 C8_array2.0 C8_array3.0 C8_array4.0 C9_array1.0 C9_array2.0 C9_array3.0 C9_array4.0 C10_array1.0 C10_array2.0 C10_array3.0 C10_array4.0 C11_array1.0 C11_array2.0 C11_array3.0 C11_array4.0 C12_array1.0 C12_array2.0 C12_array3.0 C12_array4.0 C13_array1.0 C13_array2.0 C13_array3.0 C13_array4.0 C14_array1.0 C14_array2.0 C14_array3.0 C14_array4.0 C15_array1.0 C15_array2.0 C15_array3.0 C15_array4.0 C16.0 D1_array1.3 D1_array2.3 D1_array3.3 D1_array4.3 D2_array1.3 D2_array2.3 D2_array3.3 D2_array4.3 D3_array1.3 D3_array2.3 D3_array3.3 D3_array4.3 D4_array1.3 D4_array2.3 D4_array3.3 D4_array4.3 D5_array1.3 D5_array2.3 D5_array3.3 D5_array4.3 D6_array1.3 D6_array2.3 D6_array3.3 D6_array4.3 D7_array1.3 D7_array2.3 D7_array3.3 D7_array4.3 D8_array1.3 D8_array2.3 D8_array3.3 D8_array4.3 D9_array1.3 D9_array2.3 D9_array3.3 D9_array4.3 D10_array1.3 D10_array2.3 D10_array3.3 D10_array4.3 D11_array1.3 D11_array2.3 D11_array3.3 D11_array4.3 D12_array1.3 D12_array2.3 D12_array3.3 D12_array4.3 D13_array1.3 D13_array2.3 D13_array3.3 D13_array4.3 D14_array1.3 D14_array2.3 D14_array3.3 D14_array4.3 D15_array1.3 D15_array2.3 D15_array3.3 D15_array4.3 D16.3 J2.2 P1.4 P1.5 P1.6 | length 1193.6
  Top Layer w0.6: C15_array2.0@63.998,27.788 68.148,27.788 68.784,28.424 D3_array4.3@68.784,29.49 v1(70.371,29.49) ; v1(66.523,103.505) v1@66.534,103.517 ; v1(66.561,130.277) 66.561,105.204 ; v1(67.069,98.717) 67.093,98.741 68.378,98.741 C1_array1.0@68.402,98.765 ; C7_array4.0@69.025,43.939 v1(69.025,42.494) 69.025,39.497 69.394,39.128 D4_array4.3@70.714,39.128 ; C2_array1.0@69.634,108.277 66.561,105.204 ; v1(70.091,92.57) 70.13,92.609 D1_array1.3@70.13,93.979 ; C3_array1.0@70.993,118.78 70.993,116.446 71.374,116.065 v1(71.374,113.919) 71.386,113.931 72.632,113.931 D3_array1.3@72.644,113.943 ; D2_array1.3@71.387,103.517 v1@66.534,103.517 ; C4_array3.0@72.187,54.798 v1(72.187,52.735) 72.187,50.673 72.81,50.05 D5_array4.3@73.863,50.05 ; C4_array1.0@74.447,128.546 74.479,128.515 74.479,123.781 v1(74.511,123.749) 74.529,123.767 76.194,123.767 D4_array1.3@76.213,123.786 ; v1(76.543,64.897) C3_array4.0@76.543,66.189 ; D1_array4.3@80.657,35.536 81.914,35.536 82.271,35.179 C6_array3.0@82.271,30.699 ; C8_array2.0@81.572,77.213 81.572,72.74 81.924,72.389 D7_array4.3@83.274,72.389 ; C5_array1.0@81.575,136.701 81.575,136.606 81.58,136.601 81.58,133.234 81.471,133.125 81.471,132.359 82.156,131.674 83.125,131.674 83.325,131.874 D5_array1.3@83.325,131.888 ; D15_array3.3@85.039,46.331 86.181,46.331 86.728,45.783 v1(86.728,43.04) ; v1(85.395,25.375) 85.382,25.362 85.382,23.865 D2_array4.3@85.369,23.852 86.656,23.852 87.008,23.5 C15_array4.0@87.008,19.04 ; C14_array3.0@86.258,88.046 v1(86.258,86.487) 86.258,83.833 86.831,83.26 D8_array4.3@88.126,83.26 ; C6_array1.0@88.775,144.093 88.806,144.062 88.806,141.039 v1(88.837,141.008) 88.837,140.046 89.528,139.354 90.377,139.354 90.426,139.305 D6_array1.3@90.577,139.305 ; v1(89.703,99.641) C3_array2.0@90.945,99.641 90.945,95.263 91.365,94.842 D9_array4.3@92.583,94.842 ; D14_array3.3@90.487,55.932 91.667,55.932 92.215,55.385 C2_array4.0@92.215,51.133 ; C14_array4.0@91.923,110.868 v1(91.923,109.791) 91.923,106.578 92.33,106.171 D10_array4.3@93.625,106.171 ; C7_array3.0@92.456,122.336 v1(92.456,121.044) 92.456,119.413 94.158,117.711 D11_array4.3@94.158,117.461 ; C3_array3.0@93.37,133.766 93.37,130.48 93.702,130.149 93.702,129.006 v1(93.74,128.967) D12_array4.3@95.149,128.967 ; D13_array3.3@95.643,65.838 97.007,65.838 97.358,65.487 v1(97.358,62.763) 97.363,62.758 97.363,61.081 C5_array2.0@97.368,61.076 ; v1(97.815,140.818) 97.822,140.811 99.103,140.811 D13_array4.3@99.11,140.805 ; C9_array1.0@98.146,166.024 98.152,166.018 98.152,161.22 v1(98.158,161.214) 98.17,161.226 99.836,161.226 D9_array1.3@99.848,161.238 ; v1(98.663,148.676) C7_array1.0@99.86,148.676 99.86,144.704 100.649,143.915 D7_array1.3@101.702,143.915 ; C7_array2.0@101.041,83.957 v1(101.041,82.783) 101.041,81.61 100.698,81.267 100.698,78.549 ; C8_array1.0@101.308,157.845 101.314,157.839 101.314,154.769 v1(101.321,154.762) 101.359,154.724 101.57,154.724 103.01,153.284 D8_array1.3@103.01,153.034 ; C2_array2.0@101.625,95.12 101.625,90.856 102.173,90.309 D11_array3.3@103.315,90.309 103.308,90.302 103.308,88.297 v1(103.302,88.29) ; C15_array3.0@102.502,70.844 102.502,75.095 101.954,75.642 D12_array3.3@100.698,75.642 100.698,78.549 ; D10_array3.3@102.769,79.196 101.345,79.196 100.698,78.549 ; v1(103.796,172.898) 104.046,172.898 105.146,173.998 108.086,173.998 C10_array1.0@108.609,174.521 ; v1(105.743,73.975) C14_array2.0@106.909,73.975 106.921,73.962 106.921,69.736 107.507,69.15 D9_array3.3@108.611,69.15 ; C9_array4.0@106.883,142.179 v1(106.883,143.599) ; D16.3@107.366,107.405 108.52,107.405 109.08,106.845 v1(109.08,104.203) C13_array3.0@109.08,102.619 ; D15_array4.3@108.128,118.695 109.282,118.695 109.842,118.135 v1(109.842,115.494) C6_array4.0@109.842,113.909 ; D14_array4.3@108.572,129.44 109.689,129.44 110.249,128.88 v1(110.249,126.238) C10_array2.0@110.249,124.654 ; D14_array1.3@110.819,156.819 110.766,156.819 110.566,157.019 110.795,157.019 110.795,157.861 110.049,158.607 C13_array1.0@110.049,159.779 110.056,159.771 114.013,159.771 ; C5_array3.0@111.547,134.188 v1(114.221,134.188) v1@114.259,134.226 ; C16.0@112.56,64.259 112.56,59.957 113.065,59.451 D8_array3.3@114.207,59.451 ; D11_array1.3@112.597,172.059 112.585,172.071 112.585,173.571 v1(112.573,173.584) 114.313,173.584 114.541,173.812 C11_array1.0@117.396,173.812 ; v1(113.411,161.582) 113.411,161.556 D13_array1.3@113.399,161.544 113.399,161.356 113.411,161.344 113.411,160.373 114.013,159.771 ; D15_array1.3@114.503,149.48 118.924,149.48 ; C14_array1.0@114.614,159.169 114.013,159.771 ; C5_array4.0@116.243,144.643 116.243,146.799 118.924,149.48 ; D11_array2.3@116.789,97.918 117.906,97.918 118.44,97.384 C9_array2.0@118.44,93.119 ; D10_array2.3@117.741,110.123 118.896,110.123 119.456,109.563 v1(119.456,106.921) C1_array4.0@119.456,105.337 ; C1_array3.0@118.364,54.404 118.364,50.203 118.975,49.592 D7_array3.3@120.066,49.592 ; D9_array2.3@118.44,121.616 119.813,121.616 120.599,122.403 ; D8_array2.3@119.291,133.504 120.849,133.504 121.345,133.007 123.163,133.007 D5_array2.3@123.202,132.969 123.402,133.169 124.139,133.169 125.125,134.154 126.493,134.154 v1@126.52,134.127 ; C13_array2.0@120.117,116.818 v1(120.117,118.453) 120.599,118.935 120.599,122.403 ; C15_array1.0@120.348,136.944 122.411,136.944 123.989,138.522 124.871,138.522 D6_array2.3@125.071,138.722 v1(126.619,138.722) ; C2_array3.0@120.599,125.797 120.599,122.403 ; D12_array2.3@121.45,88.241 122.668,88.241 123.203,87.706 C8_array3.0@123.203,83.404 ; D12_array1.3@122.237,160.706 122.237,160.525 122.257,160.506 122.257,159.435 122.662,159.03 122.885,159.03 v1(122.923,158.991) 122.885,158.953 122.885,157.962 121.704,156.781 C12_array1.0@120.17,156.781 120.17,150.727 118.924,149.48 ; D5_array2.3@123.202,132.969 D5_array2.3@123.241,133.007 ; C12_array4.0@123.914,44.891 123.914,40.729 124.55,40.093 D6_array3.3@125.705,40.093 ; D13_array2.3@126.225,78.551 127.329,78.551 127.914,77.965 C10_array3.0@127.914,73.752 ; v1(126.585,134.154) 127.574,134.154 127.926,134.506 127.926,134.507 C6_array2.0@128.026,134.607 ; C4_array4.0@129.086,119.291 v1(130.607,119.291) 133.439,119.291 133.897,119.749 D4_array2.3@133.897,120.853 ; C1_array2.0@129.642,35.201 129.642,31.026 130.34,30.328 131.358,30.328 D5_array3.3@131.39,30.36 ; D14_array2.3@131.026,68.924 132.142,68.924 132.804,68.263 v1(132.804,65.799) C11_array4.0@132.804,64.189 ; C12_array3.0@135.407,25.626 135.407,21.412 135.967,20.852 D4_array3.3@137.3,20.852 ; D15_array2.3@135.75,59.221 136.93,59.221 137.427,58.725 C12_array2.0@137.427,54.41 ; C9_array3.0@136.719,112.7 141.021,112.7 141.505,113.184 D3_array2.3@141.505,114.415 ; D1_array3.3@140.144,49.531 141.439,49.531 141.91,49.06 C11_array3.0@141.91,44.732 ; D2_array3.3@144.653,39.371 145.991,39.371 146.342,39.02 C10_array4.0@146.342,34.534 ; C13_array4.0@145.723,108.344 v1(147.256,108.344) 150.157,108.344 150.509,108.695 D2_array2.3@150.509,110.122 ; C8_array4.0@154.041,104.47 v1(155.931,104.47) 158.489,104.47 158.84,104.822 D1_array2.3@158.84,106.185 ; D3_array3.3@155.74,35.345 156.996,35.345 157.632,34.709 C11_array2.0@157.632,30.458 ; v1@66.534,103.517 66.561,103.543 66.561,105.204 ; v1@114.259,134.226 115.837,135.804 D7_array2.3@115.896,135.804 ; v1@114.259,134.226 114.318,134.226 D7_array2.3@115.896,135.804 ; D7_array2.3@115.896,135.804 116.096,136.005 116.346,136.005 116.146,135.804 D7_array2.3@115.896,135.804
  Bottom Layer w0.6: J2.2@62.293,87.82 68.097,87.82 70.091,89.814 ; v1(66.523,103.505) 66.523,99.317 67.069,98.771 v1(67.069,98.717) 67.069,95.593 v1(70.091,92.57) 70.091,89.814 ; v1(70.371,29.49) 70.371,34.849 69.025,36.195 69.025,40.678 ; v1(71.374,113.919) 68.741,113.919 68.389,114.27 68.389,122.209 ; v1(74.511,123.749) 70.142,123.749 68.496,122.103 68.389,122.209 ; v1(85.395,25.375) 85.395,30.34 v1(82.283,33.452) 82.283,33.472 84.654,35.843 ; v1(86.258,86.487) 82.906,89.84 ; v1(88.837,141.008) 81.432,141.008 ; v1(89.703,99.641) 89.703,97.691 82.906,90.894 82.906,89.84 ; v1(91.923,109.791) 91.923,120.456 92.456,120.99 v1(92.456,121.044) 92.456,124.981 90.068,127.368 90.068,130.708 ; v1(92.253,52.654) 92.253,50.381 ; v1(97.815,140.818) 97.815,139.781 101.091,136.505 103.328,136.505 106.883,140.06 v1(106.883,143.599) ; v1(98.158,161.214) 98.158,160.147 ; v1(101.041,82.783) 101.041,86.03 v1(103.302,88.29) ; v1(101.321,154.762) 95.186,154.762 ; v1(105.743,73.975) 104.146,72.377 v1(102.527,72.377) 102.527,67.932 v1(97.358,62.763) 97.358,55.486 92.253,50.381 ; v1(106.947,72.517) 106.947,68.364 v1(112.522,62.789) 112.522,58.623 v1(118.339,52.807) 118.339,50.832 123.952,45.218 v1(123.952,43.243) 123.952,41.192 129.591,35.554 v1(129.591,33.503) 129.591,28.651 134.087,24.155 v1(135.395,24.155) ; v1(113.411,161.582) 113.424,161.595 113.424,166.967 112.997,167.394 112.997,173.159 v1(112.573,173.584) 112.052,174.104 ; v1(114.221,134.188) 112.22,134.188 110.16,136.248 110.16,142.24 108.801,143.599 v1(106.883,143.599) ; v1(120.117,118.453) 120.117,114.097 119.456,113.436 ; v1(130.607,119.291) 132.309,117.589 ; v1(155.931,104.47) 151.13,104.47 v1(147.256,108.344) 146.578,109.022 142.184,109.022 138.519,112.687 v1(137.782,112.687) 133.032,112.687 132.309,113.411 132.309,117.589 ; v1(157.62,32.156) 157.62,34.442 155.905,36.157 v1(146.355,36.157) 146.355,41.821 v1(141.897,46.279) 141.897,51.575 v1(137.465,56.007) 137.465,61.138 v1(132.804,65.799) 132.804,70.409 v1(127.902,75.311) 127.902,80.264 v1(123.165,85.001) 123.165,90.018 v1(118.427,94.755) 118.427,101.625 119.456,102.654 v1(119.456,106.921) 119.456,113.436 ; 68.389,122.209 66.561,124.038 v1(66.561,130.277) 68.201,131.916 72.869,131.916 73.541,132.588 77.953,132.588 ; 69.025,40.678 v1(69.025,42.494) 69.025,49.573 v1(72.187,52.735) 72.187,60.541 v1(76.543,64.897) 76.543,70.066 78.975,72.498 79.051,72.498 v1(81.521,74.968) 81.521,80.213 79.883,81.852 78.08,81.852 ; 69.025,40.678 73.859,35.843 84.654,35.843 ; 70.091,89.814 70.091,83.845 72.085,81.852 78.08,81.852 ; 77.953,132.588 79.65,132.588 80.132,133.071 v1(81.471,133.071) 81.508,133.033 81.508,132.47 81.859,132.118 88.659,132.118 90.068,130.708 ; 77.953,132.588 79.502,134.137 79.502,139.078 81.432,141.008 ; 78.08,81.852 82.906,86.677 82.906,89.84 ; 81.432,141.008 90.964,150.539 ; 84.654,35.843 86.728,37.917 v1(86.728,43.04) 86.728,44.856 92.253,50.381 ; 90.068,130.708 91.809,128.967 v1(93.74,128.967) 100.906,128.967 101.314,129.375 108.407,129.375 110.249,127.533 v1(110.249,126.238) 110.249,121.971 109.842,121.564 v1(109.842,115.494) 109.842,110.122 109.08,109.36 v1(109.08,104.203) 115.1,110.223 116.243,110.223 119.456,113.436 ; 90.964,150.539 95.186,154.762 ; 90.964,150.539 96.8,150.539 v1(98.663,148.676) 98.702,148.638 98.702,147.797 102.9,143.599 v1(106.883,143.599) ; 95.186,154.762 98.158,157.734 98.158,160.147 ; 98.158,160.147 96.799,161.506 96.799,167.538 102.159,172.898 v1(103.796,172.898) 105.003,174.104 112.052,174.104 ; 112.052,174.104 111.658,174.498 123.558,174.498 124.663,173.393 124.663,160.731 v1(122.923,158.991) 126.949,154.965 126.949,143.666 127.003,143.612 126.619,143.227 v1(126.619,138.722) 126.602,138.705 126.602,134.171 v1(126.585,134.154) 129.04,134.154 129.591,133.604 129.591,129.565 133.985,125.171 133.985,121.094 132.309,119.418 132.309,117.589
  other v1: 80.683,38.608 77.673,57.848 82.283,69.113 69.812,69.875 87.414,80.073 112.643,84.525 101.606,124.174 137.858,126.441 126.949,143.612 112.154,166.751 122.949,169.113
NetD1_array1_5: D1_array1.5 D2_array1.2 | length 4.3
  Top Layer w0.4: D1_array1.5@71.73,100.179 72.022,100.471 71.988,100.471 71.73,100.729 71.73,101.371 72.212,101.854 72.517,101.854 72.987,102.324 D2_array1.2@72.987,103.517
NetD1_array1_6: D1_array1.6 D2_array1.1 | length 3.9
  Top Layer w0.4: D1_array1.6@73.33,100.179 73.393,100.242 73.393,101.294 74.499,102.401 74.499,103.429 D2_array1.1@74.587,103.517
NetD1_array2_1: D1_array2.1 D15_array1.6 | length 67.8
  Top Layer w0.4: D15_array1.6@111.303,143.28 111.429,143.154 111.429,142.165 111.863,141.73 v1(113.386,141.73) ; v1(119.71,144.691) 129.032,144.691 158.84,114.883 D1_array2.1@158.84,109.385
  Bottom Layer w0.4: v1(113.386,141.73) 113.494,141.73 113.597,141.834 115.684,141.834 117.847,143.996 119.015,143.996 v1(119.71,144.691)
NetD1_array2_2: D1_array2.2 D15_array1.5 | length 71
  Top Layer w0.4: v1(119.697,147.174) 127.68,147.174 160.553,114.301 160.553,108.019 160.319,107.785 D1_array2.2@158.84,107.785
  Bottom Layer w0.4: v1(112.903,143.28) 115.802,143.28 v1(119.697,147.174)
NetD1_array2_5: D1_array2.5 D2_array2.2 | length 7.1
  Top Layer w0.4: D2_array2.2@150.509,111.722 v1(150.509,111.784) ; v1(150.546,107.15) 150.654,107.15 151.276,107.772 152.627,107.772 D1_array2.5@152.64,107.785